# Altium PCB BMS_Slavee.PcbDoc (part 1 of 4)
Units mm, origin at the board's own origin, x right, y up, seen from the top; angles counter-clockwise.
Board outline 197.87 x 123.44 mm, 2 copper layers (Top Layer, Bottom Layer); 344 components, 178 nets, 953 pads, 755 vias.
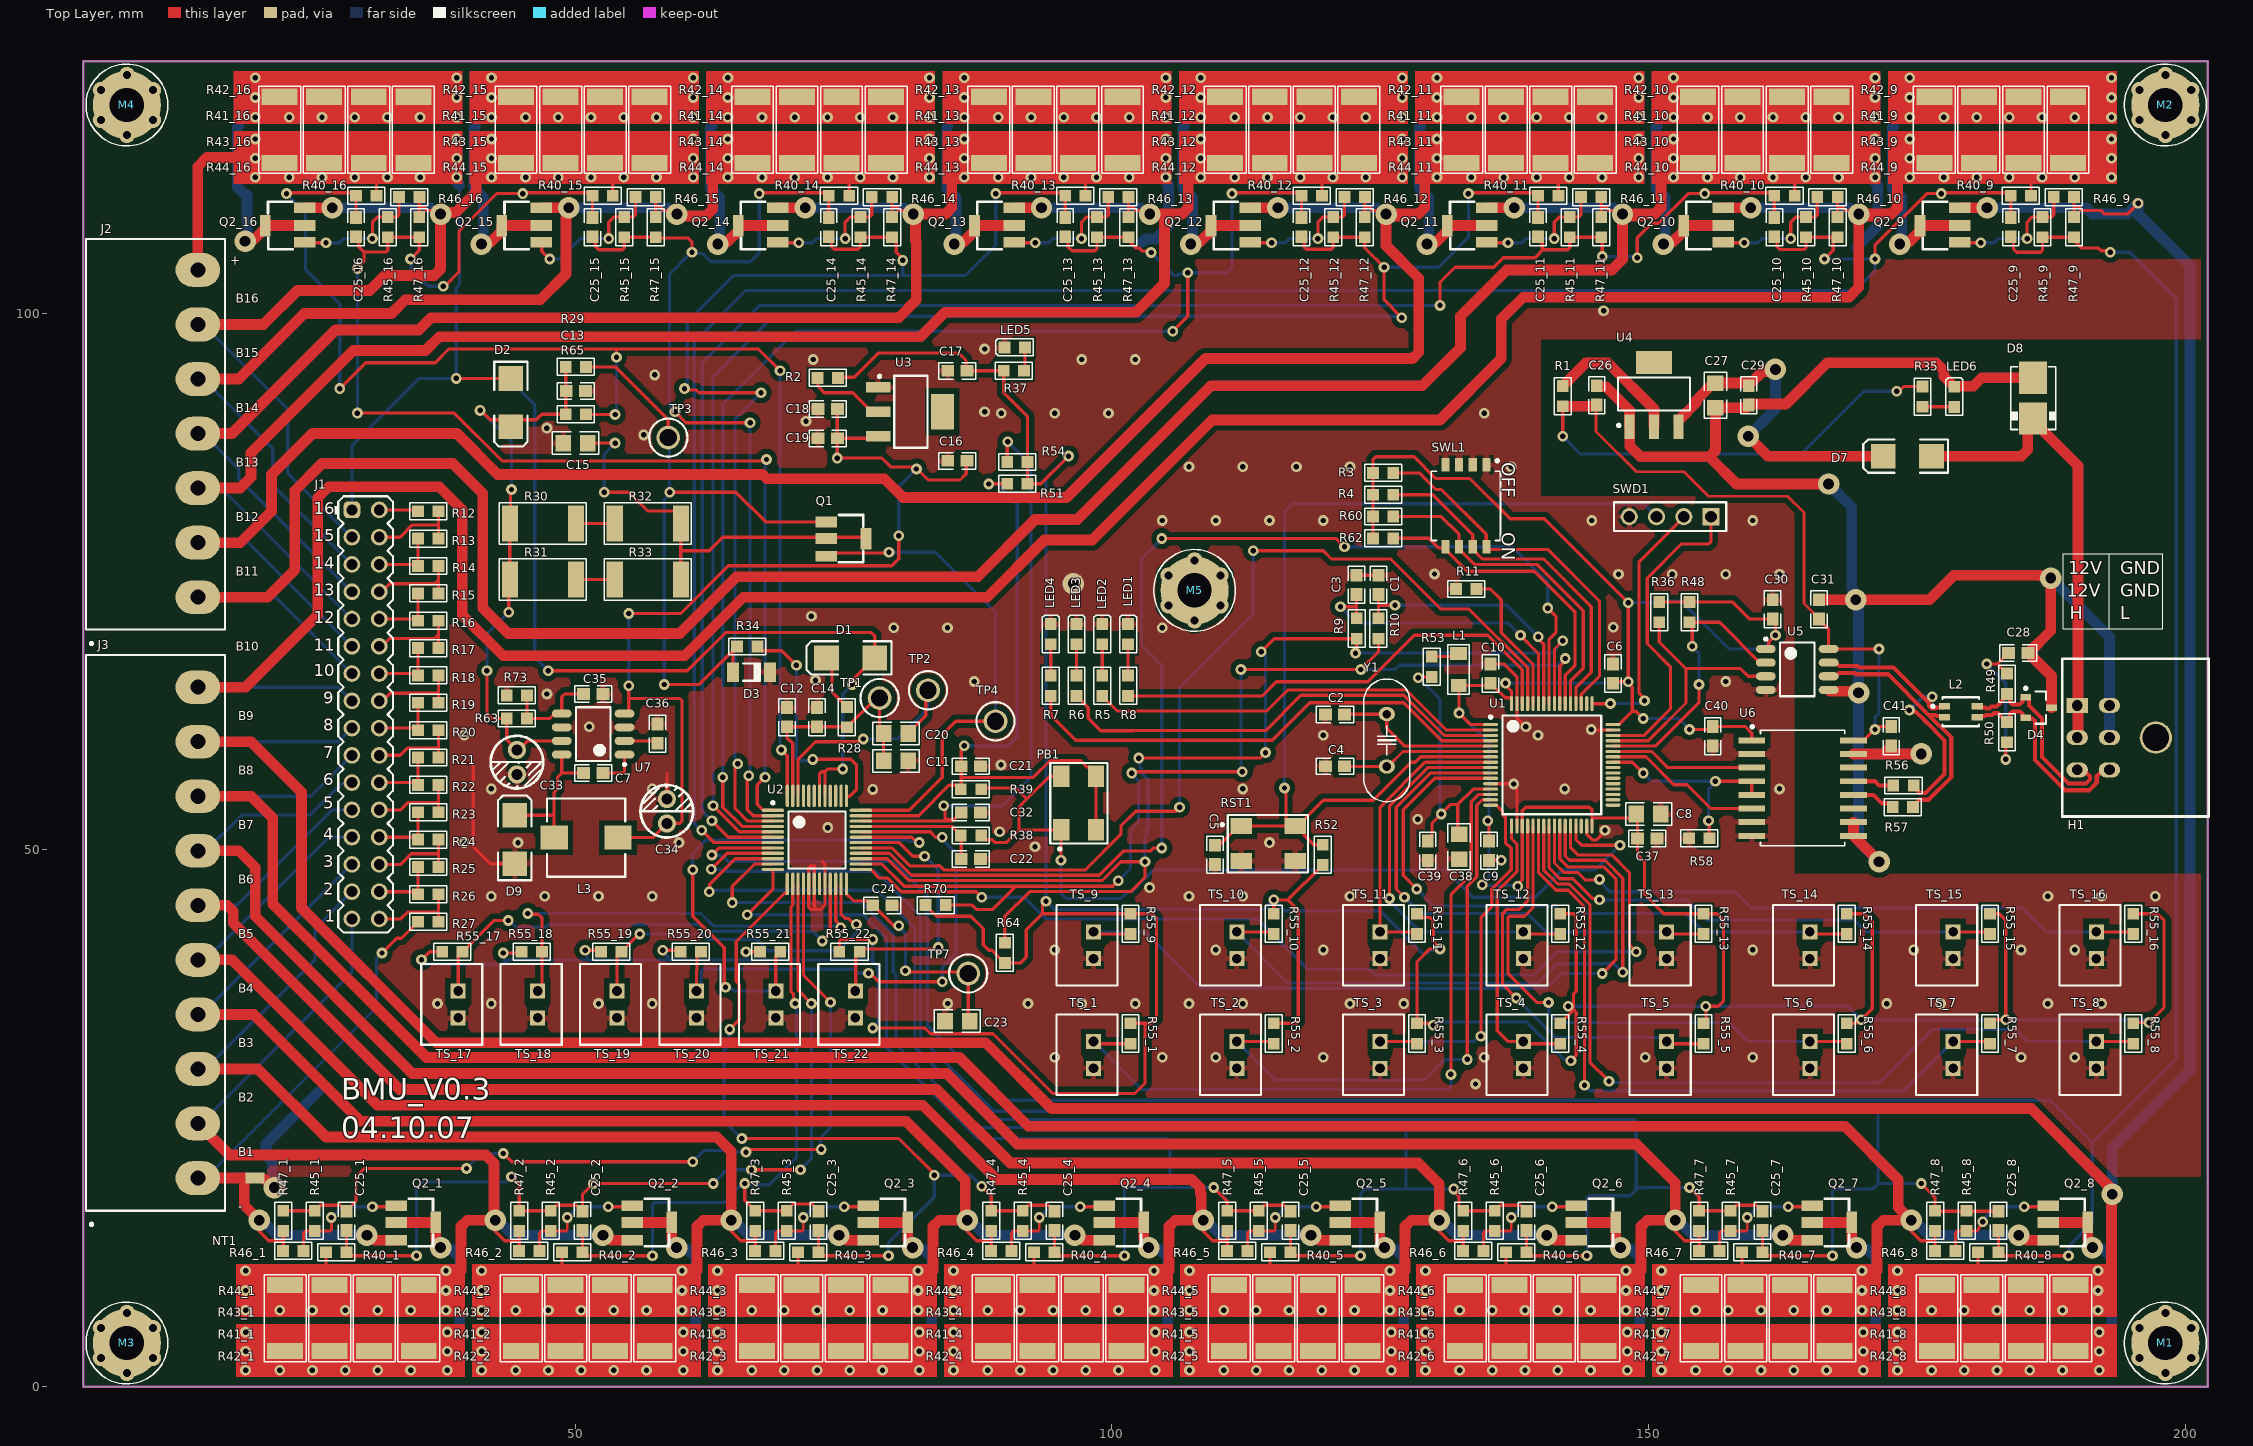
[diagram p0: Top Layer view]
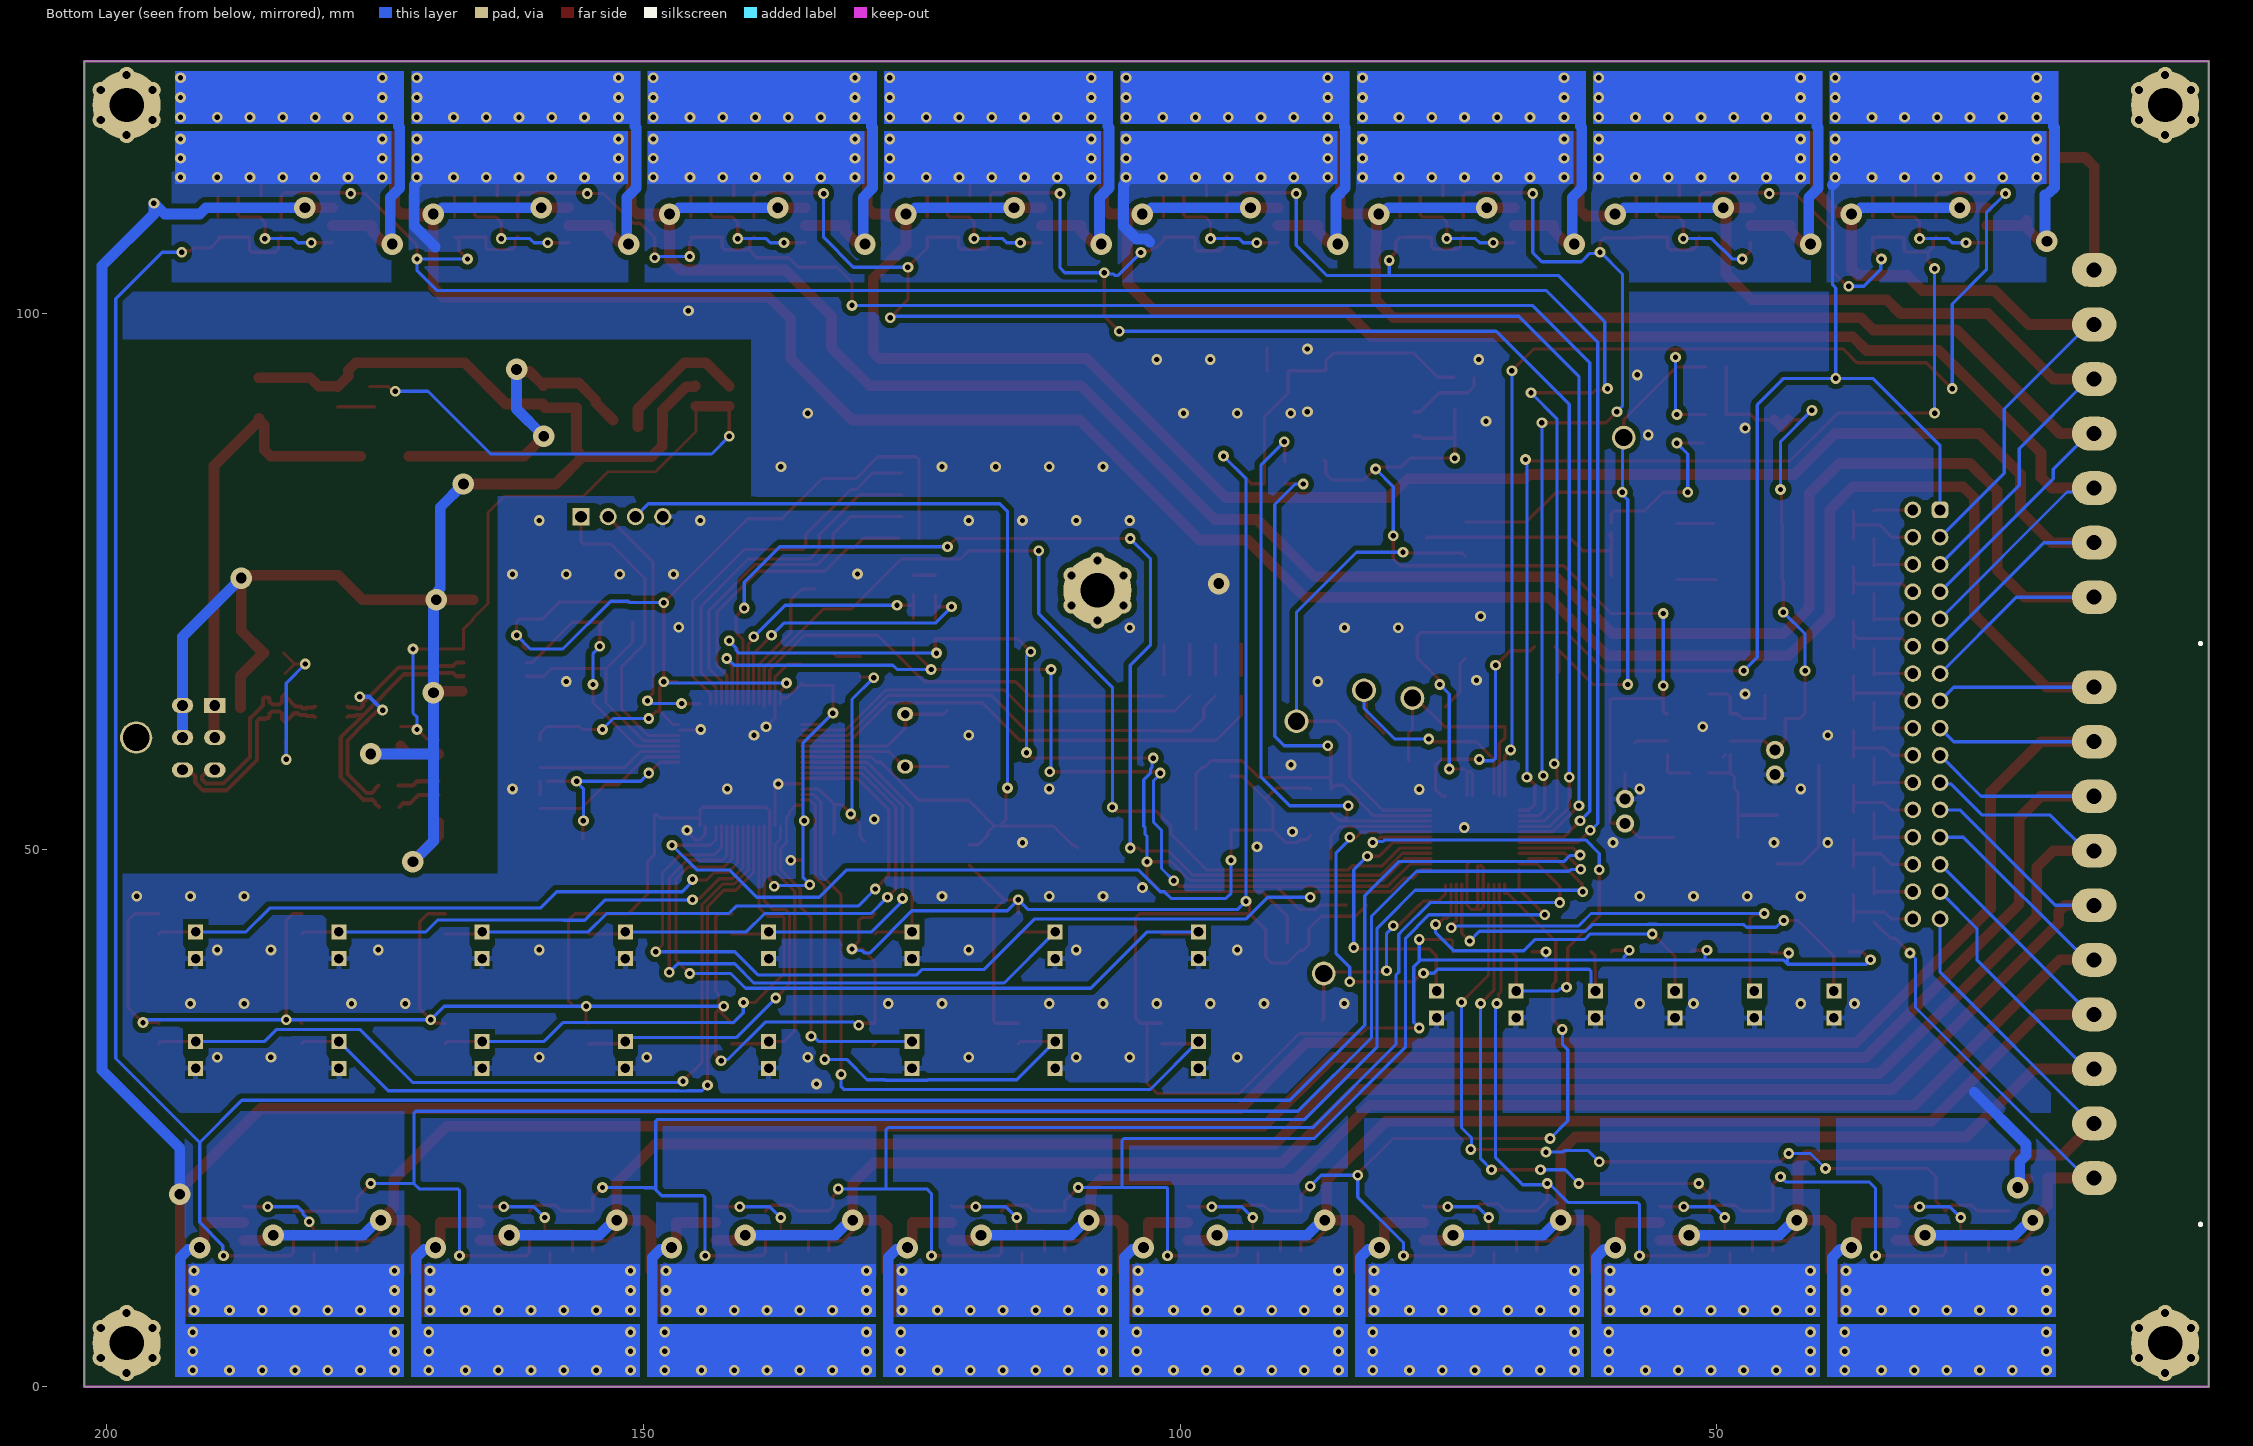
[diagram p1: Bottom Layer view, seen from below]

## Layer stack, top to bottom
Top Solder: solder mask 0.0102, Solder Resist, Dk 3.5
Top Layer: signal copper 0.0356
Dielectric 1: dielectric 0.32, FR-4, Dk 4.8
Bottom Layer: signal copper 0.0356
Bottom Solder: solder mask 0.0102, Solder Resist, Dk 3.5

## Board outline
4.191,0 4.191,123.444 202.057,123.444 202.057,0

## Design rules (kind name [scope] priority, off if disabled: settings)
Clearance [All] p1: gap=0.254 ignorepadtopadclearanceinfootprint=TRUE except(0.2: Arc-Track Arc-SMDPad Track-Track Track-SMDPad SMDPad-SMDPad; 0.5: Arc-Poly Arc-Region Track-Poly Track-Region SMDPad-Poly SMDPad-Region THPad-Poly THPad-Region Via-Poly Via-Region Fill-Fill Fill-Poly Fill-Region Fill-Text Fill-Hole Poly-Poly Poly-Region Poly-Text Poly-Hole Region-Region Region-Text Region-Hole)
DiffPairsRouting [All] p1: maxlimit=0.254 minlimit=0.254 mostfreqgap=0.254 toplayer_minwidth=0.381 toplayer_maxwidth=0.381 toplayer_prefwidth=0.381 bottomlayer_minwidth=0.381 bottomlayer_maxwidth=0.381 bottomlayer_prefwidth=0.381 maxuncoupledlength=12.7
MinimumSolderMaskSliver [All] p1: minsoldermaskwidth=0.003
PlaneConnect [All] p1: planeconnectstyle=Relief reliefexpansion=0.508 reliefentries=4 reliefconductorwidth=0.5 reliefairgap=0.254
PolygonConnect [All] p1: thpad.connectstyle=Relief thpad.reliefconductorwidth=0.5 thpad.reliefentries=4 thpad.polygonreliefangle="90 Angle" thpad.airgapwidth=0.254 smdpad.connectstyle=Relief smdpad.reliefconductorwidth=0.5 smdpad.reliefentries=4 smdpad.polygonreliefangle="90 Angle" smdpad.airgapwidth=0.254 via.connectstyle=Direct via.reliefconductorwidth=0.5 via.reliefentries=4 via.polygonreliefangle="90 Angle" via.airgapwidth=0.254
RoomDefinition TS17 [InComponentClass('TS17')] p1: confinementstyle=ConfineIn formatcopy=TRUE lockcomponents=FALSE outline 35.306,31.496 35.306,39.704 36.525,39.704 36.525,41.618 40.615,41.618 40.615,39.704 41.704,39.704 41.704,31.496
RoomDefinition TS18 [InComponentClass('TS18')] p2: confinementstyle=ConfineIn formatcopy=TRUE lockcomponents=FALSE outline 42.704,31.496 42.704,39.704 43.923,39.704 43.923,41.618 48.012,41.618 48.012,39.704 49.101,39.704 49.101,31.496
RoomDefinition TS19 [InComponentClass('TS19')] p3: confinementstyle=ConfineIn formatcopy=TRUE lockcomponents=FALSE outline 50.101,31.496 50.101,39.704 51.32,39.704 51.32,41.618 55.41,41.618 55.41,39.704 56.499,39.704 56.499,31.496
RoomDefinition TS20 [InComponentClass('TS20')] p4: confinementstyle=ConfineIn formatcopy=TRUE lockcomponents=FALSE outline 57.499,31.496 57.499,39.704 58.718,39.704 58.718,41.618 62.807,41.618 62.807,39.704 63.896,39.704 63.896,31.496
RoomDefinition TS21 [InComponentClass('TS21')] p5: confinementstyle=ConfineIn formatcopy=TRUE lockcomponents=FALSE outline 64.896,31.496 64.896,39.704 66.116,39.704 66.116,41.618 70.205,41.618 70.205,39.704 71.294,39.704 71.294,31.496
RoomDefinition TS22 [InComponentClass('TS22')] p6: confinementstyle=ConfineIn formatcopy=TRUE lockcomponents=FALSE outline 72.294,31.496 72.294,39.704 73.513,39.704 73.513,41.618 77.603,41.618 77.603,39.704 78.692,39.704 78.692,31.496
RoomDefinition TS1 [InComponentClass('TS1')] p7: confinementstyle=ConfineIn formatcopy=TRUE lockcomponents=FALSE outline 94.488,26.797 94.488,35.005 100.886,35.005 100.886,34.938 102.832,34.938 102.832,30.848 100.886,30.848 100.886,26.797
RoomDefinition TS16 [InComponentClass('TS16')] p8: confinementstyle=ConfineIn formatcopy=TRUE lockcomponents=FALSE outline 187.895,37.005 187.895,45.213 194.293,45.213 194.293,45.146 196.239,45.146 196.239,41.056 194.293,41.056 194.293,37.005
RoomDefinition TS15 [InComponentClass('TS15')] p9: confinementstyle=ConfineIn formatcopy=TRUE lockcomponents=FALSE outline 174.551,37.005 174.551,45.213 180.949,45.213 180.949,45.146 182.895,45.146 182.895,41.056 180.949,41.056 180.949,37.005
RoomDefinition TS14 [InComponentClass('TS14')] p10: confinementstyle=ConfineIn formatcopy=TRUE lockcomponents=FALSE outline 161.208,37.005 161.208,45.213 167.605,45.213 167.605,45.146 169.551,45.146 169.551,41.056 167.605,41.056 167.605,37.005
RoomDefinition TS13 [InComponentClass('TS13')] p11: confinementstyle=ConfineIn formatcopy=TRUE lockcomponents=FALSE outline 147.864,37.005 147.864,45.213 154.261,45.213 154.261,45.146 156.208,45.146 156.208,41.056 154.261,41.056 154.261,37.005
RoomDefinition TS12 [InComponentClass('TS12')] p12: confinementstyle=ConfineIn formatcopy=TRUE lockcomponents=FALSE outline 134.52,37.005 134.52,45.213 140.917,45.213 140.917,45.146 142.864,45.146 142.864,41.056 140.917,41.056 140.917,37.005
RoomDefinition TS11 [InComponentClass('TS11')] p13: confinementstyle=ConfineIn formatcopy=TRUE lockcomponents=FALSE outline 121.176,37.005 121.176,45.213 127.573,45.213 127.573,45.146 129.52,45.146 129.52,41.056 127.573,41.056 127.573,37.005
RoomDefinition TS10 [InComponentClass('TS10')] p14: confinementstyle=ConfineIn formatcopy=TRUE lockcomponents=FALSE outline 107.832,37.005 107.832,45.213 114.229,45.213 114.229,45.146 116.176,45.146 116.176,41.056 114.229,41.056 114.229,37.005
RoomDefinition TS9 [InComponentClass('TS9')] p15: confinementstyle=ConfineIn formatcopy=TRUE lockcomponents=FALSE outline 94.488,37.005 94.488,45.213 100.886,45.213 100.886,45.146 102.832,45.146 102.832,41.056 100.886,41.056 100.886,37.005
RoomDefinition TS8 [InComponentClass('TS8')] p16: confinementstyle=ConfineIn formatcopy=TRUE lockcomponents=FALSE outline 187.895,26.797 187.895,35.005 194.293,35.005 194.293,34.938 196.239,34.938 196.239,30.848 194.293,30.848 194.293,26.797
RoomDefinition TS7 [InComponentClass('TS7')] p17: confinementstyle=ConfineIn formatcopy=TRUE lockcomponents=FALSE outline 174.551,26.797 174.551,35.005 180.949,35.005 180.949,34.938 182.895,34.938 182.895,30.848 180.949,30.848 180.949,26.797
RoomDefinition TS6 [InComponentClass('TS6')] p18: confinementstyle=ConfineIn formatcopy=TRUE lockcomponents=FALSE outline 161.208,26.797 161.208,35.005 167.605,35.005 167.605,34.938 169.551,34.938 169.551,30.848 167.605,30.848 167.605,26.797
RoomDefinition TS5 [InComponentClass('TS5')] p19: confinementstyle=ConfineIn formatcopy=TRUE lockcomponents=FALSE outline 147.864,26.797 147.864,35.005 154.261,35.005 154.261,34.938 156.208,34.938 156.208,30.848 154.261,30.848 154.261,26.797
RoomDefinition TS4 [InComponentClass('TS4')] p20: confinementstyle=ConfineIn formatcopy=TRUE lockcomponents=FALSE outline 134.52,26.797 134.52,35.005 140.917,35.005 140.917,34.938 142.864,34.938 142.864,30.848 140.917,30.848 140.917,26.797
RoomDefinition TS3 [InComponentClass('TS3')] p21: confinementstyle=ConfineIn formatcopy=TRUE lockcomponents=FALSE outline 121.176,26.797 121.176,35.005 127.573,35.005 127.573,34.938 129.52,34.938 129.52,30.848 127.573,30.848 127.573,26.797
RoomDefinition TS2 [InComponentClass('TS2')] p22: confinementstyle=ConfineIn formatcopy=TRUE lockcomponents=FALSE outline 107.832,26.797 107.832,35.005 114.229,35.005 114.229,34.938 116.176,34.938 116.176,30.848 114.229,30.848 114.229,26.797
RoomDefinition balancer9 [InComponentClass('balancer9')] p23: confinementstyle=ConfineIn formatcopy=TRUE lockcomponents=FALSE outline 172.16,105.537 193.75,105.537 193.75,123.063 172.16,123.063
RoomDefinition balancer10 [InComponentClass('balancer10')] p24: confinementstyle=ConfineIn formatcopy=TRUE lockcomponents=FALSE outline 150.142,105.537 171.732,105.537 171.732,123.063 150.142,123.063
RoomDefinition balancer11 [InComponentClass('balancer11')] p25: confinementstyle=ConfineIn formatcopy=TRUE lockcomponents=FALSE outline 128.124,105.537 149.714,105.537 149.714,123.063 128.124,123.063
RoomDefinition balancer12 [InComponentClass('balancer12')] p26: confinementstyle=ConfineIn formatcopy=TRUE lockcomponents=FALSE outline 106.106,105.537 127.696,105.537 127.696,123.063 106.106,123.063
RoomDefinition balancer13 [InComponentClass('balancer13')] p27: confinementstyle=ConfineIn formatcopy=TRUE lockcomponents=FALSE outline 84.088,105.537 105.678,105.537 105.678,123.063 84.088,123.063
RoomDefinition balancer14 [InComponentClass('balancer14')] p28: confinementstyle=ConfineIn formatcopy=TRUE lockcomponents=FALSE outline 62.07,105.537 83.66,105.537 83.66,123.063 62.07,123.063
RoomDefinition balancer15 [InComponentClass('balancer15')] p29: confinementstyle=ConfineIn formatcopy=FALSE lockcomponents=FALSE outline 40.052,105.537 61.642,105.537 61.642,123.063 40.052,123.063
RoomDefinition balancer16 [InComponentClass('balancer16')] p30: confinementstyle=ConfineIn formatcopy=FALSE lockcomponents=FALSE outline 18.034,105.537 39.624,105.537 39.624,123.063 18.034,123.063
RoomDefinition balancer2 [InComponentClass('balancer2')] p31: confinementstyle=ConfineIn formatcopy=FALSE lockcomponents=FALSE outline 61.859,17.907 40.269,17.907 40.269,0.381 61.859,0.381
RoomDefinition balancer3 [InComponentClass('balancer3')] p32: confinementstyle=ConfineIn formatcopy=FALSE lockcomponents=FALSE outline 83.84,17.907 62.25,17.907 62.25,0.381 83.84,0.381
RoomDefinition balancer4 [InComponentClass('balancer4')] p33: confinementstyle=ConfineIn formatcopy=FALSE lockcomponents=FALSE outline 105.821,17.907 84.231,17.907 84.231,0.381 105.821,0.381
RoomDefinition balancer5 [InComponentClass('balancer5')] p34: confinementstyle=ConfineIn formatcopy=FALSE lockcomponents=FALSE outline 127.802,17.907 106.212,17.907 106.212,0.381 127.802,0.381
RoomDefinition balancer6 [InComponentClass('balancer6')] p35: confinementstyle=ConfineIn formatcopy=FALSE lockcomponents=FALSE outline 149.783,17.907 128.193,17.907 128.193,0.381 149.783,0.381
RoomDefinition balancer7 [InComponentClass('balancer7')] p36: confinementstyle=ConfineIn formatcopy=FALSE lockcomponents=FALSE outline 171.764,17.907 150.174,17.907 150.174,0.381 171.764,0.381
RoomDefinition balancer8 [InComponentClass('balancer8')] p37: confinementstyle=ConfineIn formatcopy=FALSE lockcomponents=FALSE outline 193.745,17.907 172.155,17.907 172.155,0.381 193.745,0.381
RoomDefinition balancer1 [InComponentClass('balancer1')] p38: confinementstyle=ConfineIn formatcopy=FALSE lockcomponents=FALSE outline 39.878,17.907 18.288,17.907 18.288,0.381 39.878,0.381
RoutingVias [All] p1: holewidth=0.5 width=1 viastyle="Through Hole" minholewidth=0.5 minwidth=1 maxholewidth=1 maxwidth=2
SilkToSilkClearance [All] p1: silktosilkclearance=0.001
SilkToSolderMaskClearance [IsPad] p1: minsilkscreentomaskgap=0.003 clearancetoexposedcopper=TRUE
SolderMaskExpansion [InPadClass('All Pads')] p1: expansion=0.102 istentingtop=FALSE useseparateexpansions=TRUE expansionbottom=0.102 istentingbottom=FALSE
SupplyNets "Schematic Supply Nets_6" [InNet('5V')] p1: voltage=0.000
SupplyNets "Schematic Supply Nets_9" [InNet('+Cell_16')] p2: voltage=0.000
SupplyNets "Schematic Supply Nets_8" [InNet('REG1')] p3: voltage=0.000
SupplyNets "Schematic Supply Nets_5" [InNet('12V')] p4: voltage=0.000
SupplyNets "Schematic Supply Nets_4" [InNet('GND')] p5: voltage=0.000
SupplyNets "Schematic Supply Nets_3" [InNet('VCC-CAN')] p6: voltage=0.000
SupplyNets "Schematic Supply Nets_2" [InNet('GND-ISO')] p7: voltage=0.000
SupplyNets "Schematic Supply Nets_1" [InNet('3.3V')] p8: voltage=0.000
SupplyNets "Schematic Supply Nets" [InNet('REG2')] p9: voltage=0.000
Width "Schematic Width Constraint_2" [InNet('12V')] p1: maxlimit=1 minlimit=1 preferedwidth=1 minimp=50.000000 maximp=50.000000 favimp=50.000000
Width "Schematic Width Constraint_1" [InNet('GND-ISO')] p2: maxlimit=1 minlimit=1 preferedwidth=1 minimp=50.000000 maximp=50.000000 favimp=50.000000
Width [All] p3: maxlimit=1 minlimit=0.254 preferedwidth=0.3 minimp=50.000000 maximp=50.000000 favimp=50.000000
25 further rules are at their usual default settings.

## Classes and differential pairs
component class TS22: R55_22 TS_22
component class TS21: R55_21 TS_21
component class TS20: R55_20 TS_20
component class TS19: R55_19 TS_19
component class TS18: R55_18 TS_18
component class TS17: R55_17 TS_17
channel class "Temperature Sensors": TS1 TS2 TS3 TS4 TS5 TS6 TS7 TS8 TS9 TS10 TS11 TS12 TS13 TS14 TS15 TS16 TS17 TS18 TS19 TS20 TS21 TS22
net class TS_[1..22]: TS_1 TS_2 TS_3 TS_4 TS_5 TS_6 TS_7 TS_8 TS_9 TS_10 TS_11 TS_12 TS_13 TS_14 TS_15 TS_16 TS_17 TS_18 TS_19 TS_20 TS_21 TS_22
component class TS16: R55_16 TS_16
component class TS15: R55_15 TS_15
component class TS14: R55_14 TS_14
component class TS13: R55_13 TS_13
component class TS12: R55_12 TS_12
component class TS11: R55_11 TS_11
component class TS10: R55_10 TS_10
component class TS9: R55_9 TS_9
component class TS8: R55_8 TS_8
component class TS7: R55_7 TS_7
component class TS6: R55_6 TS_6
component class TS5: R55_5 TS_5
component class TS4: R55_4 TS_4
component class TS3: R55_3 TS_3
component class TS2: R55_2 TS_2
component class TS1: R55_1 TS_1
component class MotherSheet: M1 M2 M3 M4 M5
channel class balancer: balancer1 balancer2 balancer3 balancer4 balancer5 balancer6 balancer7 balancer8 balancer9 balancer10 balancer11 balancer12 balancer13 balancer14 balancer15 balancer16
net class -Cell_[1..16]: +Cell_1 +Cell_2 +Cell_3 +Cell_4 +Cell_5 +Cell_6 +Cell_7 +Cell_8 +Cell_9 +Cell_10 +Cell_11 +Cell_12 +Cell_13 +Cell_14 +Cell_15 -Cell_1
net class -BalanceCommand_[1..16]: +BalanceCommand_1 +BalanceCommand_2 +BalanceCommand_3 +BalanceCommand_4 +BalanceCommand_5 +BalanceCommand_6 +BalanceCommand_7 +BalanceCommand_8 +BalanceCommand_9 +BalanceCommand_10 +BalanceCommand_11 +BalanceCommand_12 +BalanceCommand_13 +BalanceCommand_14 +BalanceCommand_15 -BalanceCommand_1
net class +Cell_[1..16]: +Cell_1 +Cell_2 +Cell_3 +Cell_4 +Cell_5 +Cell_6 +Cell_7 +Cell_8 +Cell_9 +Cell_10 +Cell_11 +Cell_12 +Cell_13 +Cell_14 +Cell_15 +Cell_16
net class +BalanceCommand_[1..16]: +BalanceCommand_1 +BalanceCommand_2 +BalanceCommand_3 +BalanceCommand_4 +BalanceCommand_5 +BalanceCommand_6 +BalanceCommand_7 +BalanceCommand_8 +BalanceCommand_9 +BalanceCommand_10 +BalanceCommand_11 +BalanceCommand_12 +BalanceCommand_13 +BalanceCommand_14 +BalanceCommand_15 +BalanceCommand_16
component class U_MCU: C1 C2 C3 C4 C5 C6 C8 C9 C10 C37 C38 C39 L1 LED1 LED2 LED3 LED4 R3 R4 R5 R6 R7 R8 R9 R10 R11 R52 R53 R60 R62 RST1 SWD1 SWL1 U1 Y1
component class U_Communication: C26 C27 C28 C29 C30 C31 C40 C41 D4 D7 D8 H1 LED6 R1 R35 R36 R48 R49 R50 R56 R57 R58 U4 U5 U6
component class U_BMS: C7 C11 C12 C13 C14 C15 C16 C17 C18 C19 C20 C21 C22 C23 C24 C32 C33 C34 C35 C36 D1 D2 D3 D9 J1 J2 J3 L3 LED5 NT1 PB1 Q1 R2 R12 R13 R14 R15 R16 R17 R18 R19 R20 R21 R22 R23 R24 R25 R26 R27 R28 R29 R30 R31 R32 R33 R34 R37 R38 R39 R51 R54 R63 R64 R65 R70 R73 TP1 TP2 TP3 TP4 TP7 U2 U3 U7
component class balancer16: C25_16 Q2_16 R40_16 R41_16 R42_16 R43_16 R44_16 R45_16 R46_16 R47_16
component class balancer15: C25_15 Q2_15 R40_15 R41_15 R42_15 R43_15 R44_15 R45_15 R46_15 R47_15
component class balancer14: C25_14 Q2_14 R40_14 R41_14 R42_14 R43_14 R44_14 R45_14 R46_14 R47_14
component class balancer13: C25_13 Q2_13 R40_13 R41_13 R42_13 R43_13 R44_13 R45_13 R46_13 R47_13
component class balancer12: C25_12 Q2_12 R40_12 R41_12 R42_12 R43_12 R44_12 R45_12 R46_12 R47_12
component class balancer11: C25_11 Q2_11 R40_11 R41_11 R42_11 R43_11 R44_11 R45_11 R46_11 R47_11
component class balancer10: C25_10 Q2_10 R40_10 R41_10 R42_10 R43_10 R44_10 R45_10 R46_10 R47_10
component class balancer9: C25_9 Q2_9 R40_9 R41_9 R42_9 R43_9 R44_9 R45_9 R46_9 R47_9
component class balancer8: C25_8 Q2_8 R40_8 R41_8 R42_8 R43_8 R44_8 R45_8 R46_8 R47_8
component class balancer7: C25_7 Q2_7 R40_7 R41_7 R42_7 R43_7 R44_7 R45_7 R46_7 R47_7
component class balancer6: C25_6 Q2_6 R40_6 R41_6 R42_6 R43_6 R44_6 R45_6 R46_6 R47_6
component class balancer5: C25_5 Q2_5 R40_5 R41_5 R42_5 R43_5 R44_5 R45_5 R46_5 R47_5
component class balancer4: C25_4 Q2_4 R40_4 R41_4 R42_4 R43_4 R44_4 R45_4 R46_4 R47_4
component class balancer3: C25_3 Q2_3 R40_3 R41_3 R42_3 R43_3 R44_3 R45_3 R46_3 R47_3
component class balancer2: C25_2 Q2_2 R40_2 R41_2 R42_2 R43_2 R44_2 R45_2 R46_2 R47_2
component class balancer1: C25_1 Q2_1 R40_1 R41_1 R42_1 R43_1 R44_1 R45_1 R46_1 R47_1
differential pair RSIN: +RSIN_P -RSIN_N
differential pair CAN: +CAN_N -CAN_P
differential pair CANIN: +CANIN_P -CANIN_N

## Components (designator, comment, footprint, x,y, rotation, side; value= is the part's Value field where it differs from the comment)
C1 "20pF" CAPC0603 124.841,74.676 r90 top
C2 "20pF" CAPC0603 120.777,62.611 r0 top
C3 "20pF" CAPC0603 122.784,74.676 r90 top
C4 "20pF" CAPC0603 120.777,57.785 r0 top
C5 "100nF" CAPC0603 109.601,49.53 r270 top
C6 "100nF" CAPC0603 146.685,66.421 r90 top
C7 "100nF" CAPC0603 51.689,57.15 r0 top
C8 "100nF" CAPC0603 149.86,51.054 r0 top
C9 "100nF" CAPC0603 135.128,49.911 r270 top
C10 "100nF" CAPC0603 135.255,66.421 r90 top
C11 "2.2uF" cap1206 79.883,58.293 r0 top
C12 "100nF" CAPC0603 69.723,62.368 r270 top
C13 "100nF" CAPC0603 50.073,92.748 r180 top
C14 "22pF" CAPC0603 72.517,62.368 r270 top
C15 "2.2uF" cap1206 50.038,87.884 r0 top
C16 "100nF" CAPC0603 85.609,86.233 r0 top
C17 "100nF" CAPC0603 85.609,94.615 r0 top
C18 "22nF" CAPC0603 73.533,91.059 r0 top
C19 "100nF" CAPC0603 73.533,88.328 r0 top
C20 "470nF" cap1206 79.883,60.833 r0 top
C21 "100nF" CAPC0603 86.868,57.785 r0 top
C22 "100nF" CAPC0603 86.868,49.149 r180 top
C23 "2.2uF" cap1206 85.598,34.036 r0 top
C24 "100nF" CAPC0603 78.624,44.831 r180 top
C25_1 "0.22µF" CAPC0603 28.702,15.437 r270 top (schematic designator C25)
C25_2 "0.22µF" CAPC0603 50.683,15.437 r270 top (schematic designator C25)
C25_3 "0.22µF" CAPC0603 72.664,15.437 r270 top (schematic designator C25)
C25_4 "0.22µF" CAPC0603 94.645,15.437 r270 top (schematic designator C25)
C25_5 "0.22µF" CAPC0603 116.626,15.437 r270 top (schematic designator C25)
C25_6 "0.22µF" CAPC0603 138.607,15.437 r270 top (schematic designator C25)
C25_7 "0.22µF" CAPC0603 160.588,15.437 r270 top (schematic designator C25)
C25_8 "0.22µF" CAPC0603 182.569,15.437 r270 top (schematic designator C25)
C25_9 "0.22µF" CAPC0603 183.717,108.007 r90 top (schematic designator C25)
C25_10 "0.22µF" CAPC0603 161.699,108.007 r90 top (schematic designator C25)
C25_11 "0.22µF" CAPC0603 139.681,108.007 r90 top (schematic designator C25)
C25_12 "0.22µF" CAPC0603 117.663,108.007 r90 top (schematic designator C25)
C25_13 "0.22µF" CAPC0603 95.645,108.007 r90 top (schematic designator C25)
C25_14 "0.22µF" CAPC0603 73.627,108.007 r90 top (schematic designator C25)
C25_15 "0.22µF" CAPC0603 51.609,108.007 r90 top (schematic designator C25)
C25_16 "0.22µF" CAPC0603 29.591,108.007 r90 top (schematic designator C25)
C26 "100nF" CAPC0603 145.161,92.329 r270 top
C27 "2.2uF" cap1206 156.21,92.329 r90 top
C28 "1nF" CAP0603 184.422,68.39 r0 top
C29 "100nF" CAPC0603 159.321,92.329 r90 top
C30 "100nF" CAPC0603 161.544,72.39 r270 top
C31 "100nF" CAPC0603 165.862,72.39 r270 top
C32 "100nF" CAPC0603 86.868,53.467 r0 top
C33 "10uF 100V" "CAP 5*11" 46.482,59.817 r90 top
C34 "100uF 16V" "CAP 5*11" 56.642,51.943 r270 top
C35 "1uF" CAPC0603 51.689,64.516 r180 top
C36 "100nF" CAPC0603 57.658,60.822 r270 top
C37 "2.2uF" CAP1206 149.987,53.34 r0 top
C38 "2.2uF" CAP1206 132.334,50.292 r270 top
C39 "100nF" CAPC0603 129.413,49.911 r270 top
C40 "100nF" CAPC0603 155.956,60.585 r90 top
C41 "100nF" CAPC0603 172.593,60.585 r90 top
D1 "M7" SS36 75.692,67.945 r180 top
D2 "M7" SS36 43.942,91.694 r270 top
D3 "N/A" ZENER 66.421,66.548 r0 top value=4.7V
D4 "ESDCAN01-2BLY" NPN 186.309,63.246 r0 top
D7 "M7" SS36 174.117,86.741 r180 top
D8 "SMBJ14A" SMBJSERIES_LTF-M 185.801,92.075 r90 top
D9 "SS36" SS36 44.45,50.927 r90 top
H1 "MHDR_2X03" "miniATX 2 × 3" 189.911,63.452 r0 top
J1 "resistor selector" SULLINS_PEC10DAAN 29.21,81.661 r0 top
J2 "CONN_TB8" pheonix_7 14.859,73.533 r270 top
J3 "CONN_TB8" pheonix_10 14.859,44.831 r270 top
L1 "100uH" RES1206 132.284,66.802 r270 top value=68uH
L2 "ACT1210L-201-2P-TL00" FP-ACT1210L-MFG 179.07,62.865 r0 top value=200uH
L3 "22uH" "INDUCTOR 7*7" 51.054,51.054 r180 top
LED1 "Red" LED 101.473,70.104 r270 top
LED2 "Red" LED 99.074,70.104 r270 top
LED3 "Red" LED 96.675,70.104 r270 top
LED4 "Red" LED 94.276,70.104 r270 top
LED5 "Red" led 90.932,96.774 r0 top
LED6 "Red" led 178.435,92.202 r270 top
M1 "M" MOUNTING 198.12,4.064 r0 top locked
M2 "M" MOUNTING 198.12,119.38 r0 top locked
M3 "M" MOUNTING 8.248,4.064 r0 top
M4 "M" MOUNTING 8.248,119.38 r0 top
M5 "M" MOUNTING 107.696,74.168 r0 top locked
NT1 "Net-Tie" Net-Tie_10milWide_30milLong 20.193,19.431 r0 top net-tie
PB1 "Reset" SWITCH-PB4 96.901,54.356 r0 top
Q1 "FCX495QTA" sot-89 75.249,78.939 r270 top value="40 V"
Q2_1 "KTD1624" SOT-89 35.179,15.24 r270 top value="40 V" (schematic designator Q2)
Q2_2 "KTD1624" SOT-89 57.16,15.24 r270 top value="40 V" (schematic designator Q2)
Q2_3 "KTD1624" SOT-89 79.141,15.24 r270 top value="40 V" (schematic designator Q2)
Q2_4 "KTD1624" SOT-89 101.122,15.24 r270 top value="40 V" (schematic designator Q2)
Q2_5 "KTD1624" SOT-89 123.103,15.24 r270 top value="40 V" (schematic designator Q2)
Q2_6 "KTD1624" SOT-89 145.084,15.24 r270 top value="40 V" (schematic designator Q2)
Q2_7 "KTD1624" SOT-89 167.065,15.24 r270 top value="40 V" (schematic designator Q2)
Q2_8 "KTD1624" SOT-89 189.046,15.24 r270 top value="40 V" (schematic designator Q2)
Q2_9 "KTD1624" SOT-89 177.113,108.204 r90 top value="40 V" (schematic designator Q2)
Q2_10 "KTD1624" SOT-89 155.095,108.204 r90 top value="40 V" (schematic designator Q2)
Q2_11 "KTD1624" SOT-89 133.077,108.204 r90 top value="40 V" (schematic designator Q2)
Q2_12 "KTD1624" SOT-89 111.059,108.204 r90 top value="40 V" (schematic designator Q2)
Q2_13 "KTD1624" SOT-89 89.041,108.204 r90 top value="40 V" (schematic designator Q2)
Q2_14 "KTD1624" SOT-89 67.023,108.204 r90 top value="40 V" (schematic designator Q2)
Q2_15 "KTD1624" SOT-89 45.005,108.204 r90 top value="40 V" (schematic designator Q2)
Q2_16 "KTD1624" SOT-89 22.987,108.204 r90 top value="40 V" (schematic designator Q2)
R1 "0" RES0603 142.131,92.38 r90 top
R2 "0" RES0603 73.406,94.107 r180 top
R3 "10K" RES0603 125.374,84.963 r0 top
R4 "10K" RES0603 125.374,82.931 r0 top
R5 "10K" RESC0603 99.102,65.278 r270 top
R6 "10K" RESC0603 96.703,65.278 r270 top
R7 "10K" RESC0603 94.304,65.278 r270 top
R8 "10K" RESC0603 101.501,65.278 r270 top
R9 "0" RESC0603 122.809,70.612 r270 top
R10 "0" RESC0603 124.816,70.612 r270 top
R11 "10K" RESC0603 133.011,74.295 r0 top
R12 "200" RESC0603 36.322,81.534 r180 top
R13 "200" RESC0603 36.322,78.986 r0 top
R14 "200" RESC0603 36.322,76.437 r180 top
R15 "200" RESC0603 36.322,73.889 r0 top
R16 "200" RESC0603 36.322,71.34 r180 top
R17 "200" RESC0603 36.322,68.792 r0 top
R18 "200" RESC0603 36.322,66.243 r180 top
R19 "200" RESC0603 36.322,63.695 r0 top
R20 "200" RESC0603 36.322,61.146 r180 top
R21 "200" RESC0603 36.322,58.598 r0 top
R22 "200" RESC0603 36.322,56.049 r180 top
R23 "200" RESC0603 36.322,53.501 r0 top
R24 "200" RESC0603 36.322,50.952 r180 top
R25 "200" RESC0603 36.322,48.404 r0 top
R26 "200" RESC0603 36.322,45.855 r180 top
R27 "200" RESC0603 36.322,43.307 r0 top
R28 "100" RESC0603 75.311,62.368 r270 top
R29 "N/A" RES0603 49.956,95.123 r180 top value=10K
R30 "15" RES2512 46.99,80.391 r180 top
R31 "15" RES2512 46.99,75.184 r180 top
R32 "15" RES2512 56.769,80.391 r180 top
R33 "15" RES2512 56.769,75.184 r180 top
R34 "0" RES0603 65.913,69.088 r180 top
R35 "10K" RES0603 175.641,92.329 r90 top
R36 "10K" RES0603 151.13,72.263 r90 top
R37 "10K" RES0603 90.754,94.76 r180 top
R38 "100" RES0603 86.751,51.478 r180 top
R39 "10K" RES0603 86.985,55.506 r0 top
R40_1 "100" RESC0603 27.752,12.516 r0 top (schematic designator R40)
R40_2 "100" RESC0603 49.733,12.516 r0 top (schematic designator R40)
R40_3 "100" RESC0603 71.714,12.516 r0 top (schematic designator R40)
R40_4 "100" RESC0603 93.695,12.516 r0 top (schematic designator R40)
R40_5 "100" RESC0603 115.676,12.516 r0 top (schematic designator R40)
R40_6 "100" RESC0603 137.657,12.516 r0 top (schematic designator R40)
R40_7 "100" RESC0603 159.638,12.516 r0 top (schematic designator R40)
R40_8 "100" RESC0603 181.619,12.516 r0 top (schematic designator R40)
R40_9 "100" RESC0603 184.667,110.928 r180 top (schematic designator R40)
R40_10 "100" RESC0603 162.649,110.928 r180 top (schematic designator R40)
R40_11 "100" RESC0603 140.631,110.928 r180 top (schematic designator R40)
R40_12 "100" RESC0603 118.613,110.928 r180 top (schematic designator R40)
R40_13 "100" RESC0603 96.595,110.928 r180 top (schematic designator R40)
R40_14 "100" RESC0603 74.577,110.928 r180 top (schematic designator R40)
R40_15 "100" RESC0603 52.559,110.928 r180 top (schematic designator R40)
R40_16 "100" RESC0603 30.541,110.928 r180 top (schematic designator R40)
R41_1 "13" RES2512 31.284,6.377 r270 top (schematic designator R41)
R41_2 "13" RES2512 53.265,6.377 r270 top (schematic designator R41)
R41_3 "13" RES2512 75.246,6.377 r270 top (schematic designator R41)
R41_4 "13" RES2512 97.227,6.377 r270 top (schematic designator R41)
R41_5 "13" RES2512 119.208,6.377 r270 top (schematic designator R41)
R41_6 "13" RES2512 141.189,6.377 r270 top (schematic designator R41)
R41_7 "13" RES2512 163.17,6.377 r270 top (schematic designator R41)
R41_8 "13" RES2512 185.151,6.377 r270 top (schematic designator R41)
R41_9 "13" RES2512 180.754,117.067 r90 top (schematic designator R41)
R41_10 "13" RES2512 158.736,117.067 r90 top (schematic designator R41)
R41_11 "13" RES2512 136.718,117.067 r90 top (schematic designator R41)
R41_12 "13" RES2512 114.7,117.067 r90 top (schematic designator R41)
R41_13 "13" RES2512 92.682,117.067 r90 top (schematic designator R41)
R41_14 "13" RES2512 70.664,117.067 r90 top (schematic designator R41)
R41_15 "13" RES2512 48.646,117.067 r90 top (schematic designator R41)
R41_16 "13" RES2512 26.628,117.067 r90 top (schematic designator R41)
R42_1 "13" RES2512 35.433,6.377 r270 top (schematic designator R42)
R42_2 "13" RES2512 57.414,6.377 r270 top (schematic designator R42)
R42_3 "13" RES2512 79.395,6.377 r270 top (schematic designator R42)
R42_4 "13" RES2512 101.376,6.377 r270 top (schematic designator R42)
R42_5 "13" RES2512 123.357,6.377 r270 top (schematic designator R42)
R42_6 "13" RES2512 145.338,6.377 r270 top (schematic designator R42)
R42_7 "13" RES2512 167.319,6.377 r270 top (schematic designator R42)
R42_8 "13" RES2512 189.3,6.377 r270 top (schematic designator R42)
R42_9 "13" RES2512 176.605,117.067 r90 top (schematic designator R42)
R42_10 "13" RES2512 154.587,117.067 r90 top (schematic designator R42)
R42_11 "13" RES2512 132.569,117.067 r90 top (schematic designator R42)
R42_12 "13" RES2512 110.551,117.067 r90 top (schematic designator R42)
R42_13 "13" RES2512 88.533,117.067 r90 top (schematic designator R42)
R42_14 "13" RES2512 66.515,117.067 r90 top (schematic designator R42)
R42_15 "13" RES2512 44.497,117.067 r90 top (schematic designator R42)
R42_16 "13" RES2512 22.479,117.067 r90 top (schematic designator R42)
R43_1 "13" RES2512 27.136,6.377 r270 top (schematic designator R43)
R43_2 "13" RES2512 49.117,6.377 r270 top (schematic designator R43)
R43_3 "13" RES2512 71.098,6.377 r270 top (schematic designator R43)
R43_4 "13" RES2512 93.079,6.377 r270 top (schematic designator R43)
R43_5 "13" RES2512 115.06,6.377 r270 top (schematic designator R43)
R43_6 "13" RES2512 137.041,6.377 r270 top (schematic designator R43)
R43_7 "13" RES2512 159.022,6.377 r270 top (schematic designator R43)
R43_8 "13" RES2512 181.003,6.377 r270 top (schematic designator R43)
R43_9 "13" RES2512 184.902,117.067 r90 top (schematic designator R43)
R43_10 "13" RES2512 162.884,117.067 r90 top (schematic designator R43)
R43_11 "13" RES2512 140.866,117.067 r90 top (schematic designator R43)
R43_12 "13" RES2512 118.848,117.067 r90 top (schematic designator R43)
R43_13 "13" RES2512 96.83,117.067 r90 top (schematic designator R43)
R43_14 "13" RES2512 74.812,117.067 r90 top (schematic designator R43)
R43_15 "13" RES2512 52.794,117.067 r90 top (schematic designator R43)
R43_16 "13" RES2512 30.776,117.067 r90 top (schematic designator R43)
R44_1 "13" RES2512 22.987,6.377 r270 top (schematic designator R44)
R44_2 "13" RES2512 44.968,6.377 r270 top (schematic designator R44)
R44_3 "13" RES2512 66.949,6.377 r270 top (schematic designator R44)
R44_4 "13" RES2512 88.93,6.377 r270 top (schematic designator R44)
R44_5 "13" RES2512 110.911,6.377 r270 top (schematic designator R44)
R44_6 "13" RES2512 132.892,6.377 r270 top (schematic designator R44)
R44_7 "13" RES2512 154.873,6.377 r270 top (schematic designator R44)
R44_8 "13" RES2512 176.854,6.377 r270 top (schematic designator R44)
R44_9 "13" RES2512 189.051,117.067 r90 top (schematic designator R44)
R44_10 "13" RES2512 167.033,117.067 r90 top (schematic designator R44)
R44_11 "13" RES2512 145.015,117.067 r90 top (schematic designator R44)
R44_12 "13" RES2512 122.997,117.067 r90 top (schematic designator R44)
R44_13 "13" RES2512 100.979,117.067 r90 top (schematic designator R44)
R44_14 "13" RES2512 78.961,117.067 r90 top (schematic designator R44)
R44_15 "13" RES2512 56.943,117.067 r90 top (schematic designator R44)
R44_16 "13" RES2512 34.925,117.067 r90 top (schematic designator R44)
R45_1 "300" RESC0603 25.743,15.437 r90 top (schematic designator R45)
R45_2 "300" RESC0603 47.724,15.437 r90 top (schematic designator R45)
R45_3 "300" RESC0603 69.705,15.437 r90 top (schematic designator R45)
R45_4 "300" RESC0603 91.686,15.437 r90 top (schematic designator R45)
R45_5 "300" RESC0603 113.667,15.437 r90 top (schematic designator R45)
R45_6 "300" RESC0603 135.648,15.437 r90 top (schematic designator R45)
R45_7 "300" RESC0603 157.629,15.437 r90 top (schematic designator R45)
R45_8 "300" RESC0603 179.61,15.437 r90 top (schematic designator R45)
R45_9 "300" RESC0603 186.676,108.007 r270 top (schematic designator R45)
R45_10 "300" RESC0603 164.658,108.007 r270 top (schematic designator R45)
R45_11 "300" RESC0603 142.64,108.007 r270 top (schematic designator R45)
R45_12 "300" RESC0603 120.622,108.007 r270 top (schematic designator R45)
R45_13 "300" RESC0603 98.604,108.007 r270 top (schematic designator R45)
R45_14 "300" RESC0603 76.586,108.007 r270 top (schematic designator R45)
R45_15 "300" RESC0603 54.568,108.007 r270 top (schematic designator R45)
R45_16 "300" RESC0603 32.55,108.007 r270 top (schematic designator R45)
R46_1 "200" RESC0603 23.749,12.643 r0 top (schematic designator R46)
R46_2 "200" RESC0603 45.73,12.643 r0 top (schematic designator R46)
R46_3 "200" RESC0603 67.711,12.643 r0 top (schematic designator R46)
R46_4 "200" RESC0603 89.692,12.643 r0 top (schematic designator R46)
R46_5 "200" RESC0603 111.673,12.643 r0 top (schematic designator R46)
R46_6 "200" RESC0603 133.654,12.643 r0 top (schematic designator R46)
R46_7 "200" RESC0603 155.635,12.643 r0 top (schematic designator R46)
R46_8 "200" RESC0603 177.616,12.643 r0 top (schematic designator R46)
R46_9 "200" RESC0603 188.67,110.801 r180 top (schematic designator R46)
R46_10 "200" RESC0603 166.652,110.801 r180 top (schematic designator R46)
R46_11 "200" RESC0603 144.634,110.801 r180 top (schematic designator R46)
R46_12 "200" RESC0603 122.616,110.801 r180 top (schematic designator R46)
R46_13 "200" RESC0603 100.598,110.801 r180 top (schematic designator R46)
R46_14 "200" RESC0603 78.58,110.801 r180 top (schematic designator R46)
R46_15 "200" RESC0603 56.562,110.801 r180 top (schematic designator R46)
R46_16 "200" RESC0603 34.544,110.801 r180 top (schematic designator R46)
R47_1 "100" RESC0603 22.809,15.437 r90 top (schematic designator R47)
R47_2 "100" RESC0603 44.79,15.437 r90 top (schematic designator R47)
R47_3 "100" RESC0603 66.771,15.437 r90 top (schematic designator R47)
R47_4 "100" RESC0603 88.752,15.437 r90 top (schematic designator R47)
R47_5 "100" RESC0603 110.733,15.437 r90 top (schematic designator R47)
R47_6 "100" RESC0603 132.714,15.437 r90 top (schematic designator R47)
R47_7 "100" RESC0603 154.695,15.437 r90 top (schematic designator R47)
R47_8 "100" RESC0603 176.676,15.437 r90 top (schematic designator R47)
R47_9 "100" RESC0603 189.61,108.007 r270 top (schematic designator R47)
R47_10 "100" RESC0603 167.592,108.007 r270 top (schematic designator R47)
R47_11 "100" RESC0603 145.574,108.007 r270 top (schematic designator R47)
R47_12 "100" RESC0603 123.556,108.007 r270 top (schematic designator R47)
R47_13 "100" RESC0603 101.538,108.007 r270 top (schematic designator R47)
R47_14 "100" RESC0603 79.52,108.007 r270 top (schematic designator R47)
R47_15 "100" RESC0603 57.502,108.007 r270 top (schematic designator R47)
R47_16 "100" RESC0603 35.484,108.007 r270 top (schematic designator R47)
R48 "10K" RES0603 153.942,72.263 r90 top
R49 "60" RES0603 183.225,65.354 r270 top
R50 "60" RES0603 183.515,61.087 r90 top
R51 "0" RES0603 91.313,83.947 r0 top
R52 "10K" RESC0603 119.634,49.53 r270 top
R53 "47" RESC0603 129.794,67.056 r90 top
R54 "0" RES0603 91.313,85.979 r0 top
R55_1 "10K" RESC0603 101.727,32.893 r90 top (schematic designator R55)
R55_2 "10K" RESC0603 115.071,32.893 r90 top (schematic designator R55)
R55_3 "10K" RESC0603 128.415,32.893 r90 top (schematic designator R55)
R55_4 "10K" RESC0603 141.759,32.893 r90 top (schematic designator R55)
R55_5 "10K" RESC0603 155.103,32.893 r90 top (schematic designator R55)
R55_6 "10K" RESC0603 168.447,32.893 r90 top (schematic designator R55)
R55_7 "10K" RESC0603 181.79,32.893 r90 top (schematic designator R55)
R55_8 "10K" RESC0603 195.134,32.893 r90 top (schematic designator R55)
R55_9 "10K" RESC0603 101.727,43.101 r90 top (schematic designator R55)
R55_10 "10K" RESC0603 115.071,43.101 r90 top (schematic designator R55)
R55_11 "10K" RESC0603 128.415,43.101 r90 top (schematic designator R55)
R55_12 "10K" RESC0603 141.759,43.101 r90 top (schematic designator R55)
R55_13 "10K" RESC0603 155.103,43.101 r90 top (schematic designator R55)
R55_14 "10K" RESC0603 168.447,43.101 r90 top (schematic designator R55)
R55_15 "10K" RESC0603 181.79,43.101 r90 top (schematic designator R55)
R55_16 "10K" RESC0603 195.134,43.101 r90 top (schematic designator R55)
R55_17 "10K" RESC0603 38.57,40.513 r180 top (schematic designator R55)
R55_18 "10K" RESC0603 45.968,40.513 r180 top (schematic designator R55)
R55_19 "10K" RESC0603 53.365,40.513 r180 top (schematic designator R55)
R55_20 "10K" RESC0603 60.763,40.513 r180 top (schematic designator R55)
R55_21 "10K" RESC0603 68.16,40.513 r180 top (schematic designator R55)
R55_22 "10K" RESC0603 75.558,40.513 r180 top (schematic designator R55)
R56 "60" RES0603 173.609,56.134 r180 top
R57 "60" RES0603 173.787,53.83 r0 top
R58 "10K" RES0603 154.813,50.927 r0 top
R60 "10K" RES0603 125.374,80.899 r0 top
R62 "10K" RES0603 125.374,78.867 r0 top
R63 "100K" RESC0603 44.577,62.23 r180 top value=866K
R64 "10K" RES0603 90.17,40.513 r90 top
R65 "10NA" RES0603 50.19,90.424 r0 top
R70 "10K" RES0603 83.693,44.704 r0 top
R73 "300K" RESC0603 44.577,64.389 r0 top value=2.5M
RST1 "Reset" SWITCH-PB4 114.554,50.594 r270 top
SWD1 "" "PIN HEADER 1*4 MALE" 151.993,81.029 r180 top
SWL1 "1571983-4" SW4_1571983_4P_TEC 132.969,82.042 r270 top
TP1 "TESTPOINT" "Test Point" 78.359,64.135 r0 top
TP2 "TESTPOINT" "Test Point" 82.867,64.864 r180 top
TP3 "TESTPOINT" "Test Point" 58.674,88.392 r0 top
TP4 "TESTPOINT" "Test Point" 89.154,61.976 r0 top
TP7 "TESTPOINT" "Test Point" 86.614,38.481 r0 top
TS_1 "NTC" "HEADER1*2 xn" 97.687,30.901 r270 top (schematic designator TS)
TS_2 "NTC" "HEADER1*2 xn" 111.031,30.901 r270 top (schematic designator TS)
TS_3 "NTC" "HEADER1*2 xn" 124.375,30.901 r270 top (schematic designator TS)
TS_4 "NTC" "HEADER1*2 xn" 137.719,30.901 r270 top (schematic designator TS)
TS_5 "NTC" "HEADER1*2 xn" 151.062,30.901 r270 top (schematic designator TS)
TS_6 "NTC" "HEADER1*2 xn" 164.406,30.901 r270 top (schematic designator TS)
TS_7 "NTC" "HEADER1*2 xn" 177.75,30.901 r270 top (schematic designator TS)
TS_8 "NTC" "HEADER1*2 xn" 191.094,30.901 r270 top (schematic designator TS)
TS_9 "NTC" "HEADER1*2 xn" 97.687,41.109 r270 top (schematic designator TS)
TS_10 "NTC" "HEADER1*2 xn" 111.031,41.109 r270 top (schematic designator TS)
TS_11 "NTC" "HEADER1*2 xn" 124.375,41.109 r270 top (schematic designator TS)
TS_12 "NTC" "HEADER1*2 xn" 137.719,41.109 r270 top (schematic designator TS)
TS_13 "NTC" "HEADER1*2 xn" 151.062,41.109 r270 top (schematic designator TS)
TS_14 "NTC" "HEADER1*2 xn" 164.406,41.109 r270 top (schematic designator TS)
TS_15 "NTC" "HEADER1*2 xn" 177.75,41.109 r270 top (schematic designator TS)
TS_16 "NTC" "HEADER1*2 xn" 191.094,41.109 r270 top (schematic designator TS)
TS_17 "NTC" "HEADER1*2 xn" 38.505,35.6 r270 top (schematic designator TS)
TS_18 "NTC" "HEADER1*2 xn" 45.902,35.6 r270 top (schematic designator TS)
TS_19 "NTC" "HEADER1*2 xn" 53.3,35.6 r270 top (schematic designator TS)
TS_20 "NTC" "HEADER1*2 xn" 60.698,35.6 r270 top (schematic designator TS)
TS_21 "NTC" "HEADER1*2 xn" 68.095,35.6 r270 top (schematic designator TS)
TS_22 "NTC" "HEADER1*2 xn" 75.493,35.6 r270 top (schematic designator TS)
U1 "STM32F103RET6" "LQFP, 64" 140.97,57.912 r0 top
U2 "bq76952PFBT" STM32F103C8T6 72.517,50.927 r0 top
U3 "NCV1117DT33G" AMS1117 81.28,90.805 r0 top
U4 "NCV1117ST50T3G" AMS1117 150.495,92.456 r90 top
U5 "ISO1050DUBR" "soic 8" 163.83,66.802 r0 top
U6 "ISO3082DW" DW16 164.338,55.753 r0 top
U7 "MAX5033BUSA+T" SOIC8 51.689,60.706 r180 top
Y1 "XTAL" XTAL 125.603,60.198 r0 top

## Footprints (in the part's own frame and the unit in brackets; to place one, negate y for a bottom-side part, rotate by r counter-clockwise, add the part's x,y. Pads: shape width x height; smd on the part's side, far side on the other; paste and mask are expansions set on the pad)
AMS1117 [mm]
  rect 2.25x0.95 smd: 1(-3.052,2.29) 2(-3.052,0) 3(-3.052,-2.29)
  rect 2.15x3.35 smd: 4(2.925,0)
  silkscreen extent -3.05,-3.35 1.55,3.41, body extent -3.67,-3.25 3.33,3.25, height 1.85
CAP0603 [mm]
  rect 1.2x1.1 smd: 1(0.893,-0.064) 2(-0.907,-0.064)
  silkscreen extent -1.73,-0.83 1.72,0.7, body extent -0.9,-0.55 0.87,0.42, height 0.6
cap1206 [mm]
  rect 1.45x1.55 smd: 1(-1.15,0) 2(1.15,0)
  silkscreen extent -2.15,-1.05 2.15,1.05, body extent -1.5,-0.75 1.5,0.75, height 1.5
CAP1206 [mm]
  rect 1.45x1.55 smd: 1(-1.15,0) 2(1.15,0)
  silkscreen extent -2.15,-1.05 2.15,1.05, body extent -1.5,-0.75 1.5,0.75, height 1.5
"CAP 5*11" [mm]
  round 1.7 hole 1: 1(-2.794,1.905) 2(-0.508,1.905)
  silkscreen extent -4.1,-0.55 0.8,4.35, body extent -4.2,-0.64 0.9,4.46, height 11.55
CAPC0603 [mm]
  rect 1.2x1.1 smd: 1(-0.9,0) 2(0.9,0)
  silkscreen extent -1.73,-0.76 1.73,0.76, body extent -0.87,-0.48 0.89,0.48, height 0.6
DW16 [mm]
  rect 2.484x0.558 smd paste+0 mask+0: 1(-4.734,4.445) 2(-4.734,3.175) 3(-4.734,1.905) 4(-4.734,0.635) 5(-4.734,-0.635) 6(-4.734,-1.905) 7(-4.734,-3.175) 8(-4.734,-4.445) 9(4.734,-4.445) 10(4.734,-3.175) 11(4.734,-1.905) 12(4.734,-0.635) 13(4.734,0.635) 14(4.734,1.905) 15(4.734,3.175) 16(4.734,4.445)
  silkscreen extent -4.83,-5.37 3.92,5.84, body extent -5.32,-5.25 5.32,5.25, height 2.64
FP-ACT1210L-MFG [mm] "line fiter tdk"
  rect 1.05x0.6 smd paste+0 mask+0: 1(-1.525,0.5) 2(-1.525,-0.5) 3(1.525,-0.5) 4(1.525,0.5)
  silkscreen extent -2.72,-1.35 1.7,1.35, body extent -2.15,-1.45 2.15,1.45, height 0.25
"HEADER1*2 xn" [mm] "2.50mm Male Shrouded Header, 2p"
  rect 1.4x1.4 hole 0.9: 1(-1.25,0.6) 2(1.25,0.6)
  silkscreen extent -3.75,-2.84 3.75,2.84, body extent -3.69,-2.84 3.74,2.88, height 6.85
"INDUCTOR 7*7" [mm]
  rect 2.55x2.25 smd: 1(3.011,-0.083) 2(-2.939,-0.083)
  silkscreen extent -3.61,-3.73 3.69,3.57, body extent -3.59,-3.71 3.67,3.55, height 3
LED [mm]
  rect 1.1x1.1 smd: 1(0.963,0.028) 2(-0.938,0.028)
  silkscreen extent -1.76,-0.76 1.74,0.81, body extent -0.82,-0.36 0.78,0.44, height 0.6
led [mm]
  rect 1.1x1.1 smd: 1(0.963,0.028) 2(-0.938,0.028)
  silkscreen extent -1.76,-0.76 1.74,0.81, body extent -0.82,-0.36 0.78,0.44, height 0.6
"LQFP, 64" [mm] "LQFP, 64-Leads, Body 10.00x10.00mm, Pitch 0.50mm, IPC Medium Density"
  oval 1.4x0.3 smd: 1(-5.7,3.75) 2(-5.7,3.25) 3(-5.7,2.75) 4(-5.7,2.25) 5(-5.7,1.75) 6(-5.7,1.25) 7(-5.7,0.75) 8(-5.7,0.25) 9(-5.7,-0.25) 10(-5.7,-0.75) 11(-5.7,-1.25) 12(-5.7,-1.75) 13(-5.7,-2.25) 14(-5.7,-2.75) 15(-5.7,-3.25) 16(-5.7,-3.75) 33(5.7,-3.75) 34(5.7,-3.25) 35(5.7,-2.75) 36(5.7,-2.25) 37(5.7,-1.75) 38(5.7,-1.25) 39(5.7,-0.75) 40(5.7,-0.25) 41(5.7,0.25) 42(5.7,0.75) 43(5.7,1.25) 44(5.7,1.75) 45(5.7,2.25) 46(5.7,2.75) 47(5.7,3.25) 48(5.7,3.75)
  oval 0.3x1.4 smd: 17(-3.75,-5.7) 18(-3.25,-5.7) 19(-2.75,-5.7) 20(-2.25,-5.7) 21(-1.75,-5.7) 22(-1.25,-5.7) 23(-0.75,-5.7) 24(-0.25,-5.7) 25(0.25,-5.7) 26(0.75,-5.7) 27(1.25,-5.7) 28(1.75,-5.7) 29(2.25,-5.7) 30(2.75,-5.7) 31(3.25,-5.7) 32(3.75,-5.7) 49(3.75,5.7) 50(3.25,5.7) 51(2.75,5.7) 52(2.25,5.7) 53(1.75,5.7) 54(1.25,5.7) 55(0.75,5.7) 56(0.25,5.7) 57(-0.25,5.7) 58(-0.75,5.7) 59(-1.25,5.7) 60(-1.75,5.7) 61(-2.25,5.7) 62(-2.75,5.7) 63(-3.25,5.7) 64(-3.75,5.7)
  silkscreen extent -5.82,-4.6 4.6,4.6, body extent -6,-6 6,6, height 1.6
"miniATX 2 × 3" [mm]
  round 3 hole 2.5: 0(7.32,-3)
  rect 2x1.4 hole 1: 1(0,0)
  oval 2x1.4 hole 1: 2(0,-3) 3(0,-6) 4(3,-6) 5(3,-3) 6(3,0)
  silkscreen extent -1.4,-10.34 12.24,4.34, body extent -0.35,-9.57 11.89,3.58, height 8.83
MOUNTING [mil]
  round 250 hole 125.98: 1(0,0)
  round 60 hole 30: 2(-95.26,-55) 3(-95.26,55) 4(0,110) 5(95.26,55) 6(95.26,-55) 7(0,-110)
  silkscreen extent -150,-150 150,150
Net-Tie_10milWide_30milLong [mm] "10mil net tie, no solder mask opening, no solder paste"
  rect 1x1 smd paste-0.127 mask-0.127: 1(-0.381,0) 2(0.356,0)
NPN [mm] "SOT23, 3-Leads, Body 2.90x2.45mm, Pitch 0.95mm, IPC Medium Density"
  rect 1x0.6 smd: 1(-1.2,0.95) 2(-1.2,-0.95) 3(1.2,0)
  silkscreen extent -1.32,-1.5 0.7,1.92, body extent -0.7,-1.5 0.7,1.5, height 1.1
pheonix_7 [mm] "pheonix_7 5.08mm 200mill"
  oval 3.15x4.15 hole 1.4 paste-2539.97 mask+0: 1(0,0) 2(-5.08,0) 3(-10.16,0) 4(-15.24,0) 5(-20.32,0) 6(-25.4,0) 7(-30.48,0)
  silkscreen extent -33.38,-10.41 4.44,2.54, body extent -33.2,-10.17 2.72,2.17, height 0.25
pheonix_10 [mm] "pheonix_10 5.08mm 200mill"
  oval 3.15x4.15 hole 1.4 paste-2539.97 mask+0: 1(25.4,0) 2(20.32,0) 3(15.24,0) 4(10.16,0) 5(5.08,0) 6(0,0) 7(-5.08,0) 8(-10.16,0) 9(-15.24,0) 10(-20.32,0)
  silkscreen extent -23.32,-10.41 29.84,2.54, body extent -23.04,-10.17 28.12,2.17, height 0.25
"PIN HEADER 1*4 MALE" [mm] "Pin Header, pitch 2.54 mm, THT, Vertical, single row, 4p"
  rect 1.6x1.6 hole 1.1: 1(-3.81,0)
  round 1.6 hole 1.1: 2(-1.27,0) 3(1.27,0) 4(3.81,0)
  silkscreen extent -5.23,-1.35 5.23,1.35, body extent -5.08,-1.27 5.08,1.27, height 8.57
RES0603 [mm]
  rect 1.1x1.1 smd: 1(0.833,0.145) 2(-1.067,0.145)
  silkscreen extent -1.84,-0.64 1.61,0.93, body extent -0.9,-0.25 0.7,0.55, height 0.45
RES1206 [mm]
  rect 1.2x1.45 smd: 1(1.5,0)
  rect 1.2x1.55 smd: 2(-1.5,0)
  silkscreen extent -2.3,-1 2.3,1, body extent -1.57,-0.67 1.57,0.67, height 0.6
RES2512 [mm]
  rect 1.5x3.35 smd: 1(-3.075,0) 2(3.075,0)
  silkscreen extent -4.06,-1.95 4.06,1.95, body extent -3.3,-1.68 3.3,1.68, height 0.65
RESC0603 [mm]
  rect 1.1x1.1 smd: 1(-0.95,0) 2(0.95,0)
  silkscreen extent -1.73,-0.79 1.73,0.79, body extent -0.8,-0.4 0.8,0.4, height 0.45
SMBJSERIES_LTF-M [mm]
  rect 3x2.6 smd paste+0 mask+0: 1(-1.905,0) 2(1.905,0)
  silkscreen extent -2.92,-2.1 2.92,2.1, body extent -2.79,-1.97 2.79,1.97, height 2.49
SOIC8 [mm]
  oval 1.85x0.75 smd: 1(-2.915,1.831) 2(-2.915,0.561) 3(-2.915,-0.709) 4(-2.915,-1.979) 5(2.935,-1.979) 6(2.935,-0.709) 7(2.935,0.561) 8(2.935,1.831)
  silkscreen extent -3.04,-2.57 1.61,2.88, body extent -3.24,-2.57 3.26,2.43, height 1.35
"soic 8" [mm] "SOIC, 8-Leads, Body 4.90x3.90mm, Pitch 1.27mm, IPC Medium Density"
  oval 1.85x0.75 smd: 1(-2.925,1.905) 2(-2.925,0.635) 3(-2.925,-0.635) 4(-2.925,-1.905) 5(2.925,-1.905) 6(2.925,-0.635) 7(2.925,0.635) 8(2.925,1.905)
  silkscreen extent -3.05,-2.5 1.6,2.95, body extent -3.25,-2.5 3.25,2.5, height 1.35
sot-89 [mm]
  rect 1x2 smd: 1(-1.605,-1.84) 2(-0.055,-1.84) 3(1.605,-1.84)
  rect 2x1 smd: 2(-0.055,1.84)
  silkscreen extent -2.26,-0.68 2.17,1.59, body extent -2.27,-1.97 2.23,2.03, height 1.5
SOT-89 [mm]
  rect 1x2 smd: 1(-1.605,-1.84) 2(-0.055,-1.84) 3(1.605,-1.84)
  rect 2x1 smd: 2(-0.055,1.84)
  silkscreen extent -2.26,-0.68 2.17,1.59, body extent -2.27,-1.97 2.23,2.03, height 1.5
SS36 [mm]
  rect 2.3x2.3 smd: 1(-2.214,0.07) 2(2.286,0.07)
  silkscreen extent -3.76,-1.48 4.14,1.62, body extent -2.5,-0.82 2.58,0.96, height 2
STM32F103C8T6 [mm] "Thin QFP, 48-Leads, Body 7x7mm, Pitch 0.5mm, IPC Low Density"
  oval 2.1x0.3 smd: 1(-4.1,2.75) 2(-4.1,2.25) 3(-4.1,1.75) 4(-4.1,1.25) 5(-4.1,0.75) 6(-4.1,0.25) 7(-4.1,-0.25) 8(-4.1,-0.75) 9(-4.1,-1.25) 10(-4.1,-1.75) 11(-4.1,-2.25) 12(-4.1,-2.75) 25(4.1,-2.75) 26(4.1,-2.25) 27(4.1,-1.75) 28(4.1,-1.25) 29(4.1,-0.75) 30(4.1,-0.25) 31(4.1,0.25) 32(4.1,0.75) 33(4.1,1.25) 34(4.1,1.75) 35(4.1,2.25) 36(4.1,2.75)
  oval 0.3x2.1 smd: 13(-2.75,-4.1) 14(-2.25,-4.1) 15(-1.75,-4.1) 16(-1.25,-4.1) 17(-0.75,-4.1) 18(-0.25,-4.1) 19(0.25,-4.1) 20(0.75,-4.1) 21(1.25,-4.1) 22(1.75,-4.1) 23(2.25,-4.1) 24(2.75,-4.1) 37(2.75,4.1) 38(2.25,4.1) 39(1.75,4.1) 40(1.25,4.1) 41(0.75,4.1) 42(0.25,4.1) 43(-0.25,4.1) 44(-0.75,4.1) 45(-1.25,4.1) 46(-1.75,4.1) 47(-2.25,4.1) 48(-2.75,4.1)
  silkscreen extent -4.22,-2.65 2.65,3.57, body extent -4.5,-4.5 4.5,4.5, height 1.6
SULLINS_PEC10DAAN [mm] "SULLINS pin header male with jumper"
  round 0.025 on Mech3: 0(1.27,-20.32) 0(1.27,-17.78) 0(1.27,-15.24) 0(1.27,-12.7) 0(1.27,-10.16) 0(1.27,-7.62) 0(1.27,-5.08) 0(1.27,-2.54) 0(1.27,0) 0(1.27,-22.86)
  rrect50% 1.55x1.55 hole 1.016: 1(0,0)
  round 1.55 hole 1.016: 2(2.54,0) 3(0,-2.54) 4(2.54,-2.54) 5(0,-5.08) 6(2.54,-5.08) 7(0,-7.62) 8(2.54,-7.62) 9(0,-10.16) 10(2.54,-10.16) 11(0,-12.7) 12(2.54,-12.7) 13(0,-15.24) 14(2.54,-15.24) 15(0,-17.78) 16(2.54,-17.78) 17(0,-20.32) 18(2.54,-20.32) 19(0,-22.86) 20(2.54,-22.86) 21(0,-25.4) 22(2.54,-25.4) 23(0,-27.94) 24(2.54,-27.94) 25(0,-30.48) 26(2.54,-30.48) 27(0,-33.02) 28(2.54,-33.02) 29(0,-35.56) 30(2.54,-35.56) 31(0,-38.1) 32(2.54,-38.1)
  silkscreen extent -1.63,-39.37 3.81,1.27, body extent -1.27,-39.37 3.81,1.27, height 8.74
SW4_1571983_4P_TEC [mil]
  rect 50x30 smd paste+0 mask+0: 1(-150,75) 2(-150,25) 3(-150,-25) 4(-150,-75) 5(150,-75) 6(150,-25) 7(150,25) 8(150,75)
  silkscreen extent -170,-127 127,127, body extent -170,-124 150,120, height 91
SWITCH-PB4 [mm]
  rect 1.5x2 smd: 1(-1.627,-2.5) 1(-1.627,2.5) 2(1.627,-2.5) 2(1.627,2.5)
  silkscreen extent -2.64,-4.4 2.69,3.72, body extent -2.39,-2.5 2.44,2.45, height 2
"Test Point" [mil]
  round 87 hole 63: 1(0,0)
  silkscreen extent -70,-70 70,70, body extent -63,-63 62,63, height 225
XTAL [mm]
  oval 1.5x1.3 hole 0.8: 1(0,2.44) 2(0,-2.44)
  silkscreen extent -2.16,-5.71 2.16,5.71, body extent -2.25,-5.75 2.25,5.75, height 3.56
ZENER [mm] "MELF Diode, 2-Leads, Body 3.50x1.47mm, IPC Medium Density"
  rect 1.1x1.8 smd: 1(-1.725,0) 2(1.725,0)
  silkscreen extent -0.8,-0.87 0.8,0.8, body extent -1.86,-0.85 1.86,0.85, height 1.69